# Altium PCB Copy of PCB1.PcbDoc
Units mm, origin at the board's own origin, x right, y up, seen from the top; angles counter-clockwise.
Board outline 45.72 x 41.53 mm, 2 copper layers (Top Layer, Bottom Layer); 3 components, 7 nets, 24 pads, 0 vias.
Unrouted connection lines stored in the file: 2.
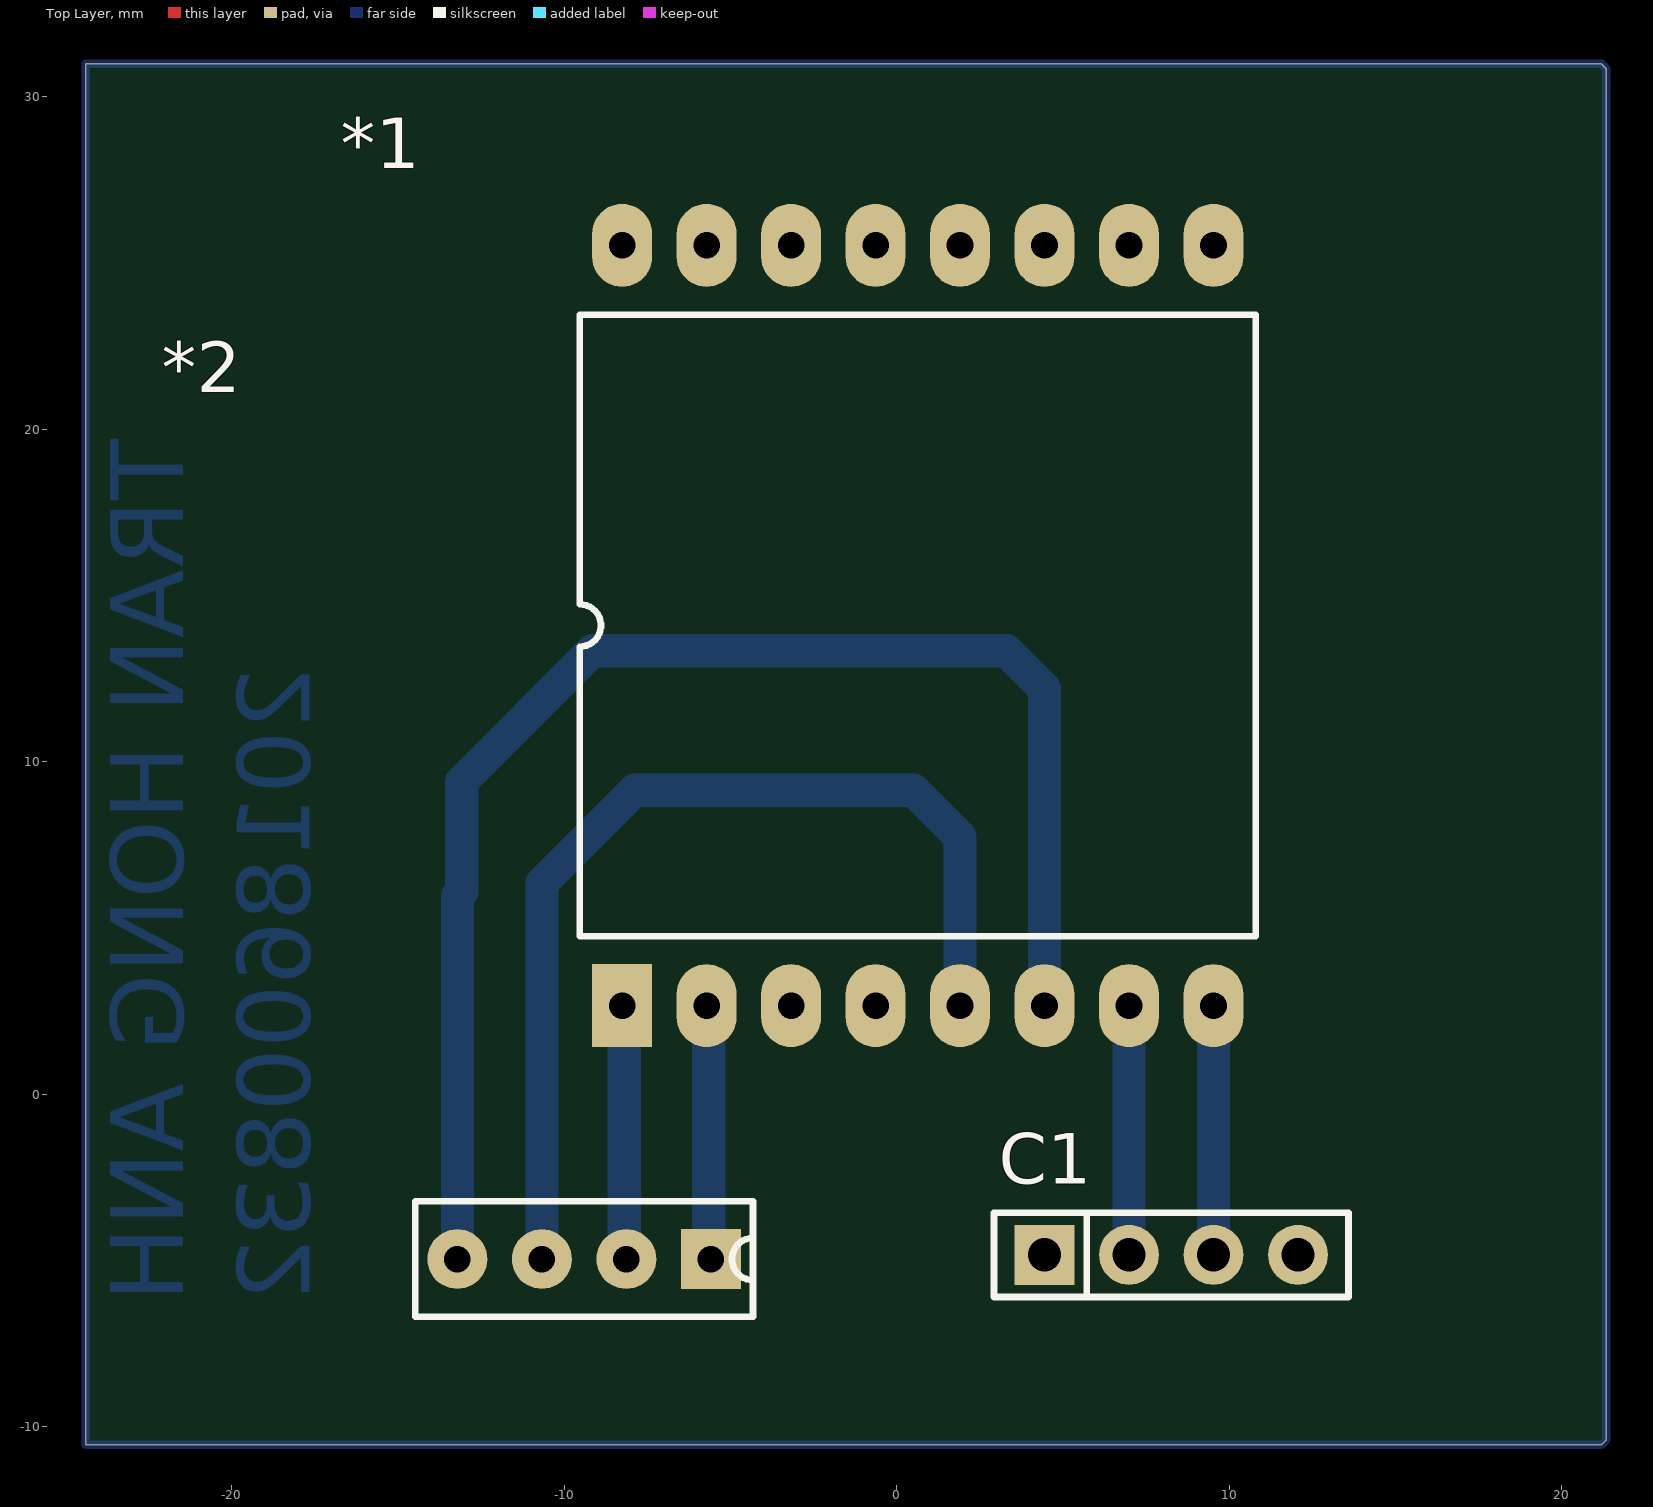
[diagram p0: Top Layer view]
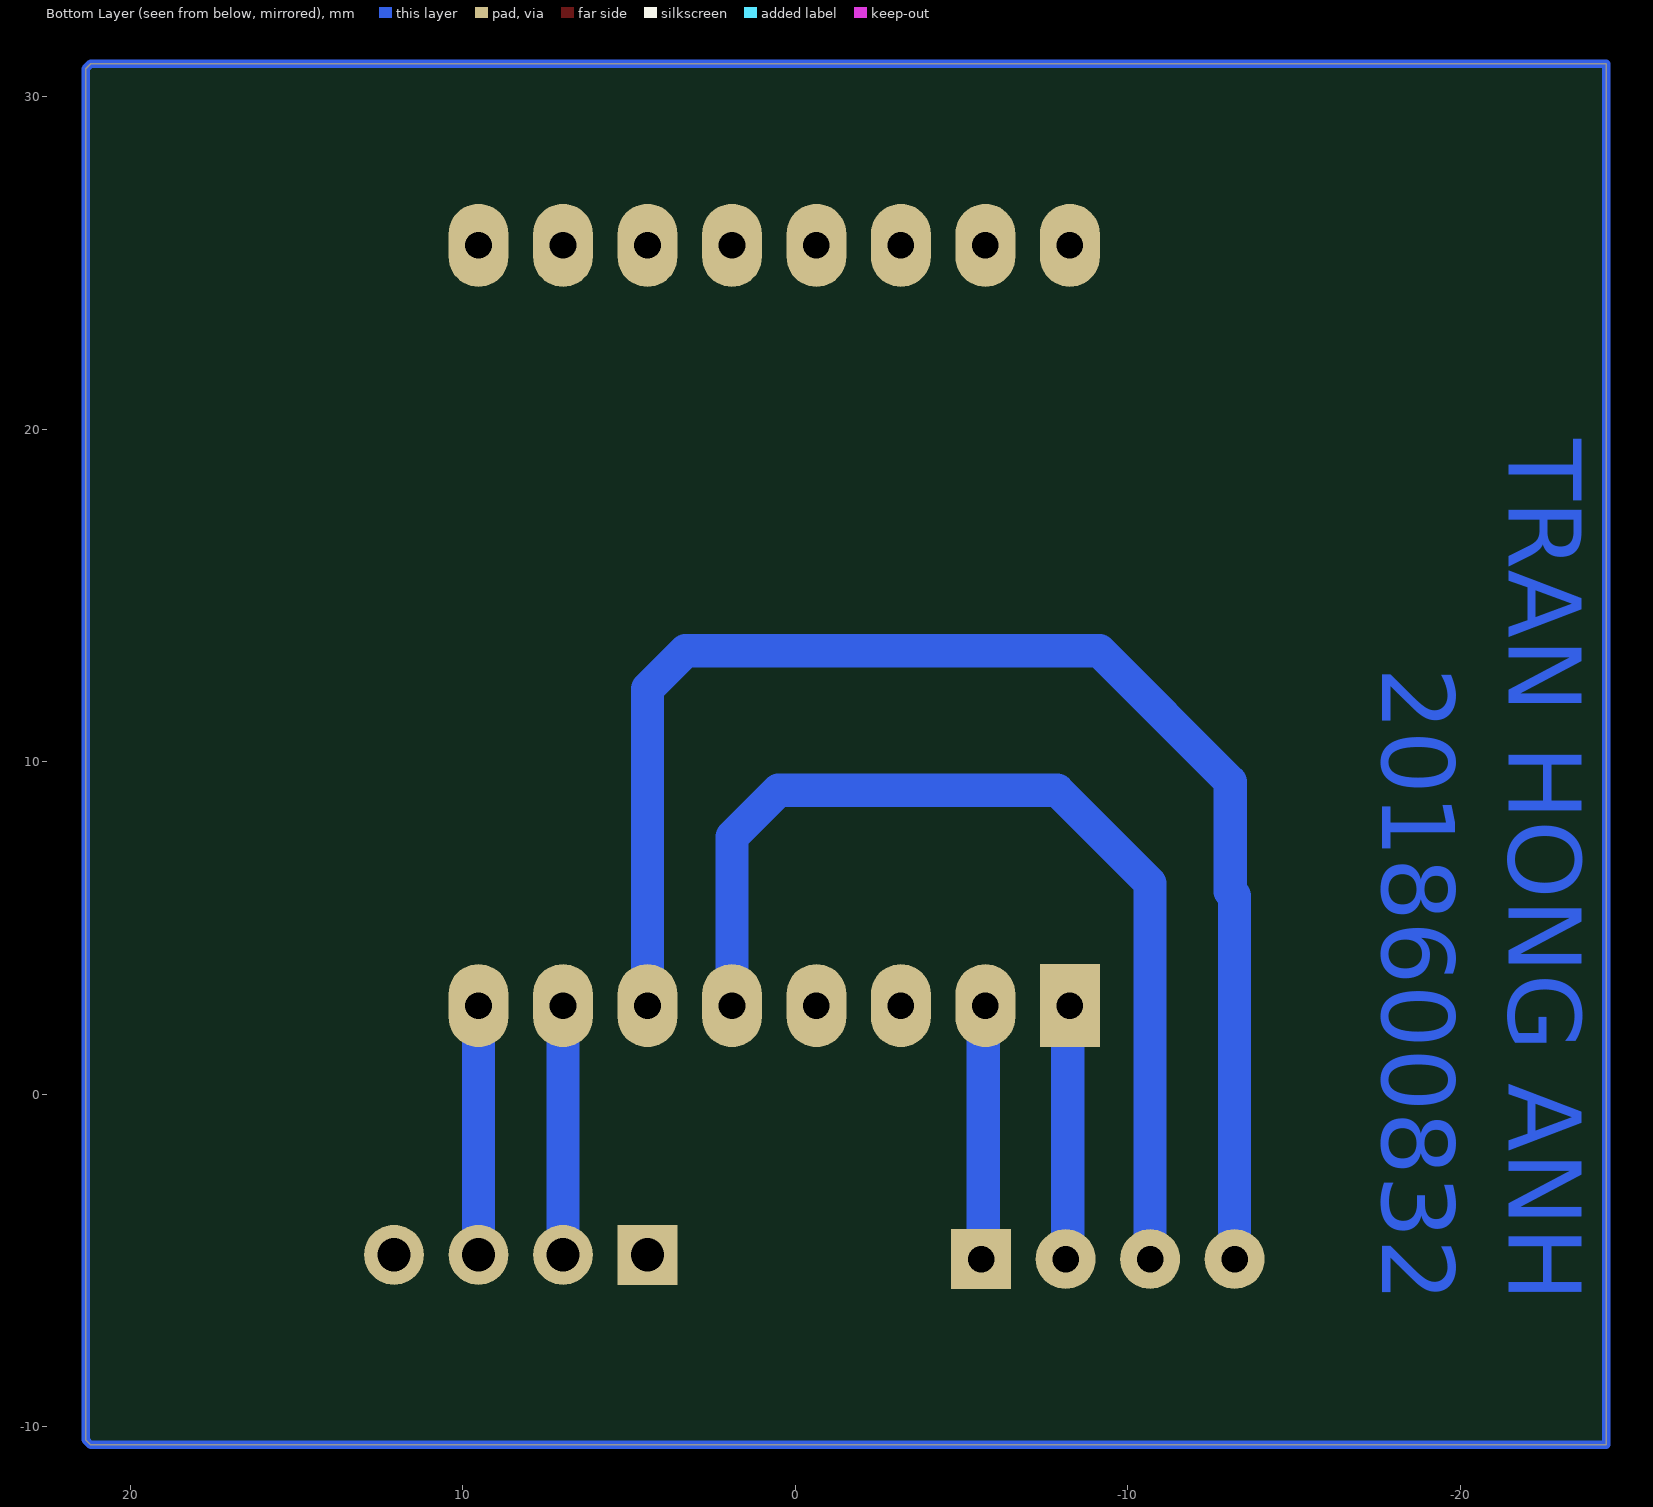
[diagram p1: Bottom Layer view, seen from below]

## Layer stack, top to bottom
Top Solder: solder mask 0.0102, Solder Resist, Dk 3.5
Top Layer: signal copper 0.0356
Dielectric 1: dielectric 0.32, FR-4, Dk 4.8
Bottom Layer: signal copper 0.0356
Bottom Solder: solder mask 0.0102, Solder Resist, Dk 3.5

## Board outline
-24.384,-10.541 -24.384,30.988 21.187,30.988 21.336,30.839 21.336,-10.392 21.187,-10.541

## Design rules (kind name [scope] priority, off if disabled: settings)
Clearance [All] p1: gap=0.254 ignorepadtopadclearanceinfootprint=FALSE except(0: Arc-Hole Track-Hole SMDPad-Hole THPad-Hole Via-Hole Fill-Hole Poly-Hole Region-Hole Text-Hole)
PolygonConnect [All] p1: connectstyle=Relief reliefconductorwidth=0.254 reliefentries=4 polygonreliefangle="90 Angle" airgapwidth=0.254
RoutingVias [All] p1: holewidth=0.711 width=1.27 viastyle="Through Hole" minholewidth=0.711 minwidth=1.27 maxholewidth=0.711 maxwidth=1.27
SolderMaskExpansion [All] p1: expansion=0.102 istentingtop=FALSE
Width [All] p1: maxlimit=1.8 minlimit=1 preferedwidth=1.5
30 further rules are at their usual default settings.

## Components (designator, comment, footprint, x,y, rotation, side; value= is the part's Value field where it differs from the comment)
*1 "Component_1" esp -8.255,2.667 r90 top
*2 "Component_1" oledi2c -5.588,-4.953 r270 top
C1 "JP4" JP4-C1T 4.445,-4.826 r0 top

## Footprints (in the part's own frame and the unit in brackets; to place one, negate y for a bottom-side part, rotate by r counter-clockwise, add the part's x,y. Pads: shape width x height; smd on the part's side, far side on the other; paste and mask are expansions set on the pad)
esp [mm]
  rect 2.5x1.8 hole 0.8: 1(0,0)
  oval 2.5x1.8 hole 0.8: 2(0,-2.54) 3(0,-5.08) 4(0,-7.62) 5(0,-10.16) 6(0,-12.7) 7(0,-15.24) 8(0,-17.78) 9(22.86,-17.78) 10(22.86,-15.24) 11(22.86,-12.7) 12(22.86,-10.16) 13(22.86,-7.62) 14(22.86,-5.08) 15(22.86,-2.54) 16(22.86,0)
  silkscreen extent 2.08,-19.05 20.78,1.27, body extent -1.4,-25.73 24.4,8.72, height 4.9
JP4-C1T [mm] "4 row, straight, gold plating"
  rect 1.8x1.8 hole 1: 1(0,0)
  round 1.8 hole 1: 2(2.54,0) 3(5.08,0) 4(7.62,0)
  silkscreen extent -1.52,-1.27 9.14,1.27, body extent -1.52,-1.25 9.14,1.25, height 8.51
oledi2c [mm]
  rect 1.8x1.8 hole 0.8: 1(0,0)
  round 1.8 hole 0.8: 2(0,-2.54) 3(0,-5.08) 4(0,-7.62)
  silkscreen extent -1.73,-8.89 1.73,1.27, body extent -25.29,-16.76 0.91,8.64, height 3.3

## Part data
C1: "WR-PHD 2.54 mm Angled Socket Header", Manufacturer="W¨¹rth Elektronik eiSos GmbH", partNo=613004143121, ComponentLink1 Description=Manufacturer, ComponentLink1URL=http://www.we-online.com, ComponentLink2 Description=Datasheet, ComponentLink2URL=http://katalog.we-online.de/em/datasheet/6130xx143121.pdf, Created by="Karrer Zheng", Created Date="29 March 2013", NoPins=04

## Nets (pads, with @x,y where several pads share a name; then routed paths per layer and width w, separated by ;. In a path a pad name is that pad's centre, name@x,y a point inside that pad or via, vN(x,y) a via of type N, cw(c..) or ccw(c..) an arc to the next point about the centre after c; other vN are vias at no path point)
GND: *1.2 *2.1 C1.1 | length 7.7
  Bottom Layer w1: *1.2 -5.651,2.603 -5.651,-4.889 *2.1
RX: *1.8 C1.3 | length 7.5
  Bottom Layer w1: C1.3 *1.8
SCL: *1.6 *2.4 | length 43.6
  Bottom Layer w1: *2.4 -13.208,5.969 -13.081,6.096 -13.081,9.398 -9.144,13.335 3.302,13.335 4.445,12.192 *1.6
SDA: *1.5 *2.3 | length 30.7
  Bottom Layer w1: *2.3 -10.668,6.35 -7.874,9.144 0.508,9.144 1.905,7.747 *1.5
TX: *1.7 C1.2 | length 7.5
  Bottom Layer w1: C1.2 *1.7
VCC: *1.1 *2.2 C1.4 | length 7.7
  Bottom Layer w1: *1.1 -8.191,2.603 -8.191,-4.889 *2.2
"": 
pads on no net: *1.3 *1.4 *1.9 *1.10 *1.11 *1.12 *1.13 *1.14 *1.15 *1.16
copper on no net: | length 174.3
  Bottom Layer w0.254: -24.384,-10.541 21.187,-10.541 21.336,-10.392 21.336,30.839 21.187,30.988 -21.844,30.988 -24.384,30.988 -24.384,-10.541

## Other copper
Bottom Layer:
  text "TRAN HONG ANH" at -21.455,19.693 h2.2 r90
  text "2018600832" at -17.645,12.835 h2.2 r90